# Altium PCB inwall_wifi_sensor.PcbDoc
Units mil, origin at the board's own origin, x right, y up, seen from the top; angles counter-clockwise.
Board outline 400 x 800 mil, 2 copper layers (Top Layer, Bottom Layer); 4 components, 0 nets, 25 pads, 3 vias.
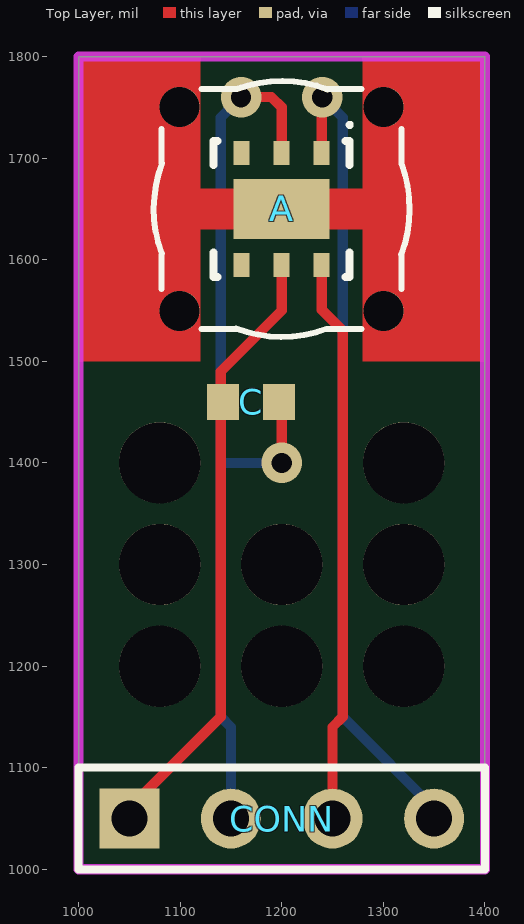
[diagram p0: Top Layer view]
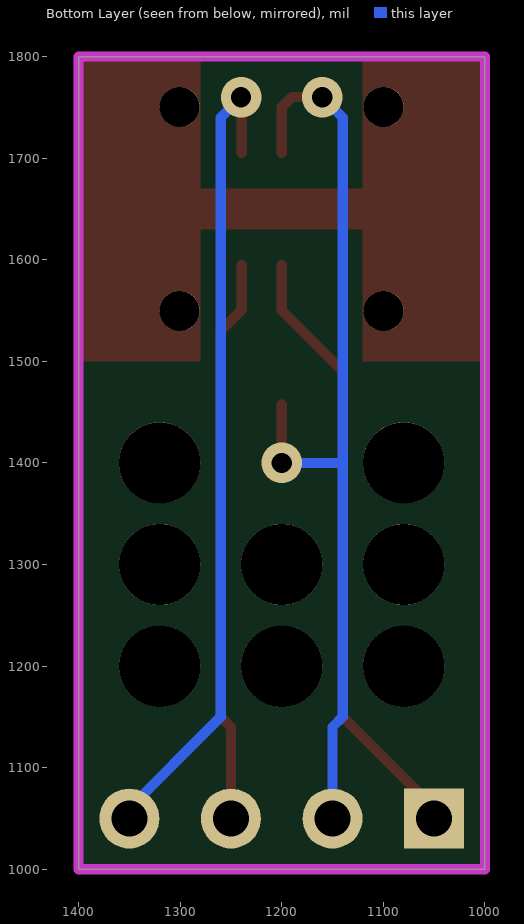
[diagram p1: Bottom Layer view, seen from below]

## Layer stack, top to bottom
Top Solder: solder mask 0.4, Solder Resist, Dk 3.5
Top Layer: signal copper 1.4
Dielectric 1: dielectric 12.6, FR-4, Dk 4.8
Bottom Layer: signal copper 1.4
Bottom Solder: solder mask 0.4, Solder Resist, Dk 3.5

## Board outline
1000,1000 1400,1000 1400,1800 1000,1800

## Design rules (kind name [scope] priority, off if disabled: settings)
Clearance [All] p1: gap=10 ignorepadtopadclearanceinfootprint=FALSE except(0: Arc-Hole Track-Hole SMDPad-Hole THPad-Hole Via-Hole Fill-Hole Poly-Hole Region-Hole Text-Hole)
PolygonConnect [All] p1: connectstyle=Relief reliefconductorwidth=10 reliefentries=4 polygonreliefangle="90 Angle" airgapwidth=10
RoutingVias [All] p1: holewidth=28 width=50 viastyle="Through Hole" minholewidth=28 minwidth=50 maxholewidth=28 maxwidth=50
SolderMaskExpansion [All] p1: expansion=4
Width [All] p1: maxlimit=10 minlimit=10 preferedwidth=10
30 further rules are at their usual default settings.

## Components (designator, comment, footprint, x,y, rotation, side; value= is the part's Value field where it differs from the comment)
A "" SF2 1200,1650 r0 top
A "" SON100P300X120_HS-7N 1200,1650 r270 top
C "" 1608[0603] 1170,1460 r180 top
CONN "" HDR1X4 1050,1050 r0 top

## Footprints (in the part's own frame and the unit in brackets; to place one, negate y for a bottom-side part, rotate by r counter-clockwise, add the part's x,y. Pads: shape width x height; smd on the part's side, far side on the other; paste and mask are expansions set on the pad)
1608[0603] [mm] "Chip Capacitor, Body 1.6x0.8mm, IPC High Density"
  rect 0.8x0.9 smd: 1(-0.7,0) 2(0.7,0)
  body extent -0.87,-0.48 0.87,0.48, height 1.3
HDR1X4 [mm] "Connector; Header; 4 Position"
  rect 1.5x1.5 hole 0.9: 1(0,0)
  round 1.5 hole 0.9: 2(2.54,0) 3(5.08,0) 4(7.62,0)
  silkscreen extent -1.27,-1.27 8.89,1.27
SF2 [mm] "SHT21 filter cap"
  round 1 hole 1 unplated: MH(-2.55,-2.55) MH(-2.55,2.55) MH(2.55,-2.55) MH(2.55,2.55)
  silkscreen extent -3.2,-3.2 3.2,3.2, body extent -3.2,-3.2 3.2,3.2, height 1.9
SON100P300X120_HS-7N [mm] "SON, 6-Leads, Body 3,00x3,00mm, Pitch 1,00mm, Thermal Pad 2,40x1,50mm, IPC Medium Density"
  rect 0.6x0.4 smd: 1(-1.4,1) 2(-1.4,0) 3(-1.4,-1) 4(1.4,-1) 5(1.4,0) 6(1.4,1)
  rect 1.5x2.4 smd: 7(0,0)
  silkscreen extent -2.15,-1.7 1.7,1.75, body extent -1.55,-1.55 1.55,1.55, height 1.2

## Free pads (board coordinates)
  round 80 hole 80 unplated: 4(1080,1200) 4(1080,1300) 4(1080,1400) 4(1200,1200) 4(1200,1300) 4(1320,1200) 4(1320,1300) 4(1320,1400)

## Via types
v1: diameter 40, hole 20, Top Layer to Bottom Layer, tented both sides, 3 vias

## Nets (pads, with @x,y where several pads share a name; then routed paths per layer and width w, separated by ;. In a path a pad name is that pad's centre, name@x,y a point inside that pad or via, vN(x,y) a via of type N, cw(c..) or ccw(c..) an arc to the next point about the centre after c; other vN are vias at no path point)
pads on no net: A.1 A.2 A.3 A.4 A.5 A.6 A.7 A.MH C.1 C.2 CONN.1 CONN.2 CONN.3 CONN.4
copper on no net: | length 2900.5
  Top Layer w10: 1050,1050 1050,1060 1140,1150 1140,1490 1200,1550 1200,1594.88 ; v1(1160,1760) 1190,1760 1200,1750 1200,1705.12 ; v1(1200,1400) 1200,1457.56 ; 1239.37,1594.88 1239.37,1550.63 1260,1530 1260,1150 1250,1140 1250,1050 ; 1239.37,1705.12 v1@1239.37,1759.37
  Bottom Layer w10: 1140,1400 v1(1200,1400) ; 1150,1050 1150,1140 1140,1150 1140,1490 1140,1740 v1(1160,1760) ; v1(1240,1760) 1260,1740 1260,1150 1355,1055

## Keep-outs
Keep-Out Layer:
  the board outline again, w10

## Other copper
Top Layer:
  region: 1000,1800 1120,1800 1120,1670 1280,1670 1280,1800 1400,1800 1400,1500 1280,1500 1280,1630 1120,1630 1120,1500 1000,1500